# Altium PCB PCB2.PcbDoc
Units mil, origin at the board's own origin, x right, y up, seen from the top; angles counter-clockwise.
Board outline 4724.41 x 984.25 mil, 2 copper layers (Top Layer, Bottom Layer); 41 components, 34 nets, 152 pads, 25 vias.
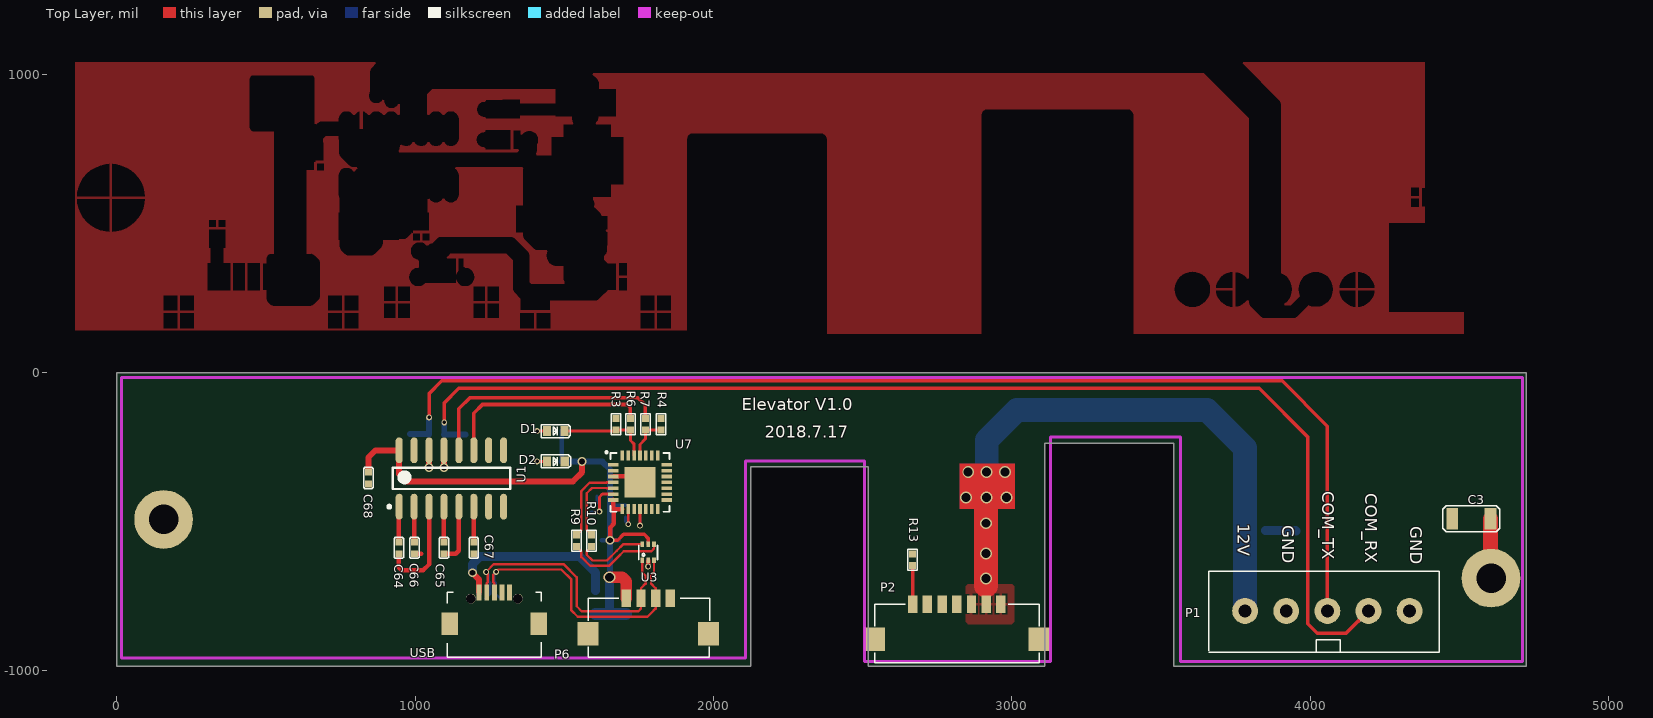
[diagram p0: Top Layer view]
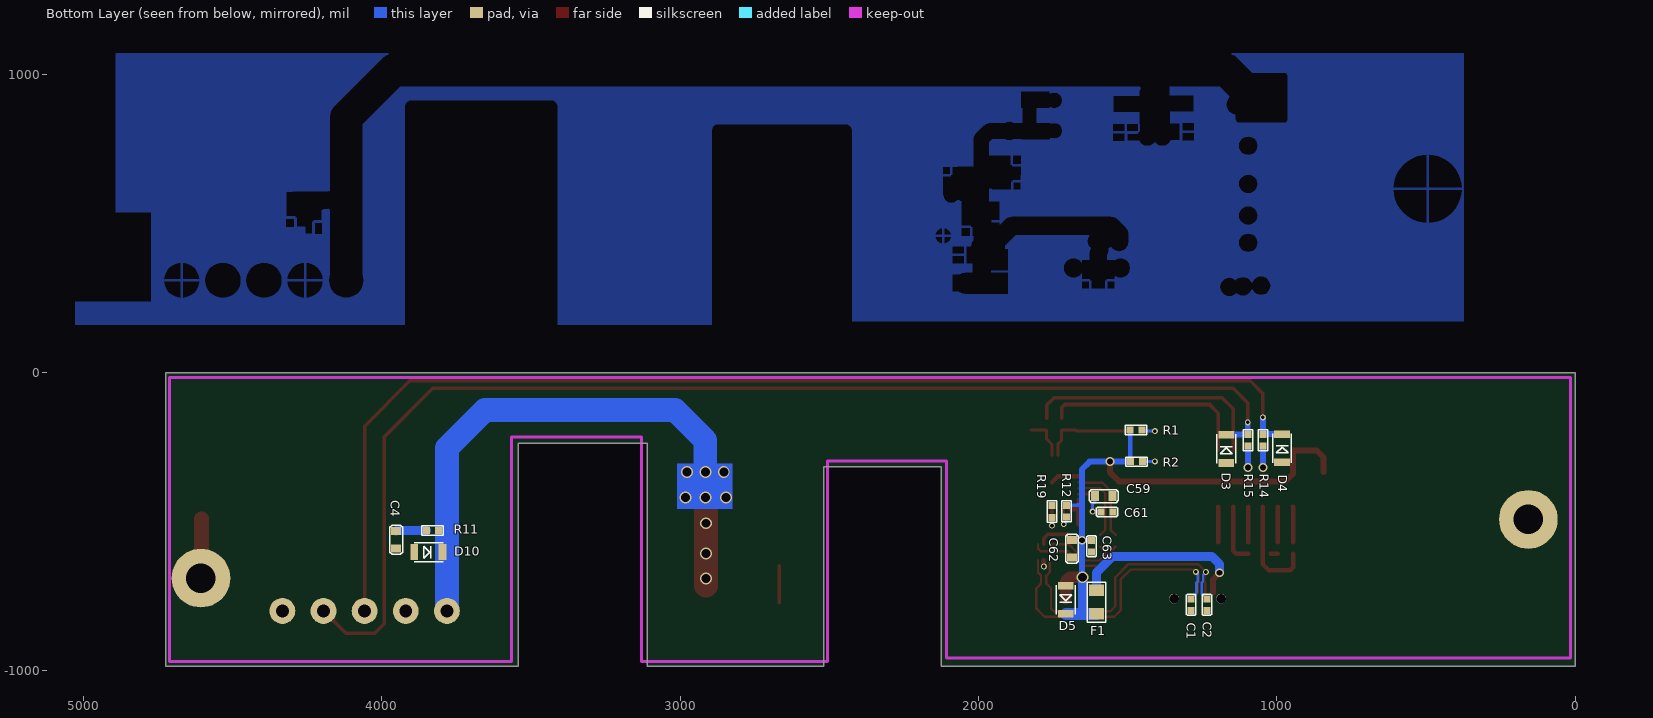
[diagram p1: Bottom Layer view, seen from below]

## Layer stack, top to bottom
Top Layer: signal copper 1.4
Dielectric: dielectric 12.6, FR-4, Dk 4.8
Bottom Layer: signal copper 1.4

## Board outline
0,-984.25 0,0 4724.41,0 4724.41,-984.25 3543.31,-984.25 3543.31,-236.22 3110.24,-236.22 3110.24,-984.25 2519.68,-984.25 2519.68,-314.96 2125.98,-314.96 2125.98,-984.25

## Design rules (kind name [scope] priority, off if disabled: settings)
Clearance [All] p1: gap=5
DiffPairsRouting [All] p1: maxlimit=10 minlimit=8 mostfreqgap=10 maxuncoupledlength=500
PolygonConnect [All] p1: connectstyle=Relief reliefconductorwidth=10 reliefentries=4 polygonreliefangle="90 Angle"
RoutingVias [All] p1: holewidth=28 width=50 viastyle="Through Hole" minholewidth=28 minwidth=50 maxholewidth=28 maxwidth=50
SilkscreenOverComponentPads [All] p1: minsilkscreentomaskgap=10
SolderMaskExpansion [All] p1: expansion=4
Width [All] p1: maxlimit=100 minlimit=8 preferedwidth=15
26 further rules are at their usual default settings.

## Classes and differential pairs
component class USB: C59 C61 C62 C63 D1 R1 R3 R4 R6 R7 R12 R19 U7
component class RS232: C64 C65 C66 C67 C68 D3 D4 R14 R15 U1
component class Interface: C1 C2 C3 C4 C58 D2 D5 D10 F1 P1 P2 P6 R2 R8 R9 R10 R11 R13 U3 USB
differential pair D: +D_P -D_N
differential pair DIN: +DIN_P -DIN_N
differential pair DD: +DD_P -DD_N

## Components (designator, comment, footprint, x,y, rotation, side; value= is the part's Value field where it differs from the comment)
C1 "3pF/50V" 0402C 1288,-759 r270 bottom
C2 "3pF/50V" 0402C 1235,-759 r270 bottom
C3 "1nF/1000V" 1206C 4604,-490 r180 top
C4 "10uF/25V" 0603C 3952,-590 r90 bottom
C59 "4.7uF/25V" 0603C 1550.95,-414 r0 bottom
C61 "0.1uF/50V" 0402C 1589.37,-467 r180 bottom
C62 "10uF/25V" 0603C 1687,-561 r270 bottom
C63 "0.1uF/50V" 0402C 1621,-562 r270 bottom
C64 "0.1uF/50V" 0402C 946,-568 r270 top
C65 "0.1uF/50V" 0402C 1097,-568 r270 top
C66 "0.1uF/50V" 0402C 998,-568 r270 top
C67 "0.1uF/50V" 0402C 1197,-568 r270 top
C68 "0.1uF/50V" 0402C 844,-373 r90 top
D1 "LED0" 0603LED 1442.22,-196.04 r0 top
D2 "LED0" 0603LED 1442.55,-297.78 r0 top
D3 "GBLC15C-LF-T7" SOD323 1170,-303 r90 bottom
D4 "GBLC15C-LF-T7" SOD323 983,-301 r90 bottom
D5 "PESD5V" SOD323 1708,-714 r270 bottom
D10 "PESD12V" SOD323 3891,-602 r180 bottom
F1 "1A" 0805R 1605,-730 r270 bottom
P1 "Header 5" KF350-5P 3782,-799 r0 top
P2 "Header 7" 7×1.25mmSMT 2668,-776 r0 top
P6 "Header 4" 4×1.25mmSMT 1708,-756.68 r0 top
R1 "1K" 0402R 1492.22,-193.04 r180 bottom
R2 "1K" 0402R 1490.53,-298.79 r180 bottom
R3 "0/NC" 0402R 1674,-193 r90 top
R4 "0/NC" 0402R 1825,-193 r90 top
R6 "0" 0402R 1722,-193 r90 top
R7 "0" 0402R 1772,-193 r90 top
R9 "33" 0402R 1541,-543.63 r270 top
R10 "33" 0402R 1592,-543.63 r270 top
R11 "33" 0402R 3850,-530 r180 bottom
R12 "1K/5%/1/8W" 0402R 1706,-445 r270 bottom
R13 "10K/NC" 0402R 2667.75,-608 r270 top
R14 "1K" 0402R 1047,-207.36 r270 bottom
R15 "1K" 0402R 1097,-207.36 r270 bottom
R19 "10K/5%/1/8W" 0402R 1754,-446 r270 bottom
U1 "MAX3232ESE+" SOIC127P600X265-16N 1122,-355 r90 top
U3 "NUF2042XV6T1" SOT563-6 1781,-603 r0 top
U7 "CP2102" QFN28N5X5-0p5P-L 1754,-368 r0 top
USB "Header 5" Micro_USB_PH 1266,-737 r90 top

## Footprints (in the part's own frame and the unit in brackets; to place one, negate y for a bottom-side part, rotate by r counter-clockwise, add the part's x,y. Pads: shape width x height; smd on the part's side, far side on the other; paste and mask are expansions set on the pad)
4×1.25mmSMT [mm]
  rect 1.8x2 smd: 0(-3.25,-3) 0(7,-3)
  rect 0.8x1.5 smd: 1(0,0) 2(1.25,0) 3(2.5,0) 4(3.75,0)
  round 0.5 on Top Overlay: ""(-0.875,0.432)
  silkscreen extent -3.25,-5 7.09,0
7×1.25mmSMT [mm]
  rect 1.8x2 smd: 0(-3.25,-3) 0(10.75,-3)
  rect 0.8x1.5 smd: 1(0,0) 2(1.25,0) 3(2.5,0) 4(3.75,0) 5(5,0) 6(6.25,0) 7(7.5,0)
  round 0.5 on Top Overlay: ""(-0.95,0.432)
  silkscreen extent -3.25,-5 10.75,0
0402C [mm]
  rect 0.6x0.6 smd: 1(0,0) 2(1,0)
  silkscreen extent -0.4,-0.4 1.4,0.4
0402R [mm]
  rect 0.6x0.6 smd: 1(0,0) 2(1,0)
  silkscreen extent -0.4,-0.4 1.4,0.4
0603C [mm]
  rect 0.7x0.85 smd: 1(0,0) 2(1.5,0)
  silkscreen extent -0.5,-0.55 2,0.55
0603LED [mm]
  rect 0.7x0.85 smd: 1(0,0) 2(1.5,0)
  silkscreen extent -0.5,-0.55 2,0.55
0805R [mm]
  rect 1x1.3 smd: 1(0,0) 2(2,0)
  silkscreen extent -0.7,-0.8 2.7,0.8
1206C [mm]
  rect 1x1.8 smd: 1(0,0) 2(3.25,0)
  silkscreen extent -0.8,-1.1 4.05,1.1
KF350-5P [mm]
  round 2.2 hole 1.1: 1(0,0) 2(3.5,0) 3(7,0) 4(10.5,0) 5(14,0)
  silkscreen extent -3.1,-3.5 16.51,3.4
Micro_USB_PH [mm]
  rect 1.35x0.42 smd: 1(0,1.3) 2(0,0.65) 3(0,0) 4(0,-0.65) 5(0,-1.3)
  rect 1.9x1.4 smd: 6(-2.675,3.811) 9(-2.675,-3.789)
  round 0.82 hole 0.82 unplated: 7(-0.525,2) 8(-0.525,-2)
  silkscreen extent -5.5,-4 0,4.01
QFN28N5X5-0p5P-L [mil]
  rect 34x12 smd mask+5: 1(-89.5,59.06) 2(-89.5,39.37) 3(-89.5,19.68) 4(-89.5,0) 5(-89.5,-19.68) 6(-89.5,-39.37) 7(-89.5,-59.06) 15(89.5,-59.06) 16(89.5,-39.37) 17(89.5,-19.68) 18(89.5,0) 19(89.5,19.68) 20(89.5,39.37) 21(89.5,59.06)
  rect 12x34 smd mask+5: 8(-59.06,-89.5) 9(-39.37,-89.5) 10(-19.68,-89.5) 11(0,-89.5) 12(19.68,-89.5) 13(39.37,-89.5) 14(59.06,-89.5) 22(59.06,89.5) 23(39.37,89.5) 24(19.68,89.5) 25(0,89.5) 26(-19.68,89.5) 27(-39.37,89.5) 28(-59.06,89.5)
  rect 102.36x102.36 smd mask+5: 29(0,0)
  silkscreen extent -114,-98 98,103
SOD323 [mm]
  rect 0.65x1.35 smd: A(0,0) K(2.4,0)
  silkscreen extent -0.03,-0.8 2.44,0.8
SOIC127P600X265-16N [mm] "SOIC, 16-Leads, Body 10.0x4.0mm (max), Pitch 1.27mm, IPC Medium Density"
  oval 2.2x0.6 smd: 1(-2.4,4.445) 2(-2.4,3.175) 3(-2.4,1.905) 4(-2.4,0.635) 5(-2.4,-0.635) 6(-2.4,-1.905) 7(-2.4,-3.175) 8(-2.4,-4.445) 9(2.4,-4.445) 10(2.4,-3.175) 11(2.4,-1.905) 12(2.4,-0.635) 13(2.4,0.635) 14(2.4,1.905) 15(2.4,3.175) 16(2.4,4.445)
  silkscreen extent -2.52,-5 0.9,5.42, body extent -2,-5 2,5, height 2.65
SOT563-6 [mil] "SOT563-6"
  rect 12x18 smd: 1(-19.68,-26.57) 2(0,-26.57) 3(20,-26.57) 4(20,27) 5(0,27) 6(-19.68,27)
  silkscreen extent -31,-24 32,24

## Part data
C1 C2 C64 C65 C66 C67 C68: library part C, "C"
C3 C4 C59 C61 C62 C63: library part Cap, "Capacitor"
D1 D2: "Typical INFRARED GaAs LED"
D3 D4: library part Diode, "Default Diode"
D5 D10: library part "D Zener", "Zener Diode"
F1: library part "Fuse 1", "Fuse"
P1 USB: "Header, 5-Pin"
P2: "Header, 7-Pin"
P6: "Header, 4-Pin"
R1 R2 R9 R10 R11 R13: library part Resistor, "Resistor SMD - IEC symbol version"
R3 R4 R6 R7 R12 R14 R15 R19: library part Res2, "Resistor"
U7: "Imported"

## Free pads (board coordinates)
  round 196.85 hole 98.43: 0(157.48,-492.13) 0(4606.3,-688.98)

## Via types
v1: diameter 20, hole 12, Top Layer to Bottom Layer, tented both sides, 10 vias
v2: diameter 40, hole 30, Top Layer to Bottom Layer, tented both sides, 10 vias
v3: diameter 30, hole 20, Top Layer to Bottom Layer, tented both sides, 5 vias

## Nets (pads, with @x,y where several pads share a name; then routed paths per layer and width w, separated by ;. In a path a pad name is that pad's centre, name@x,y a point inside that pad or via, vN(x,y) a via of type N, cw(c..) or ccw(c..) an arc to the next point about the centre after c; other vN are vias at no path point)
COM0_RX: D3.K P1.4 R15.1 | length 4033.8
  Top Layer w12: v1(1098,-167) 1098,-154 1098,-102 1147,-53 3829,-53 3992,-216 3992,-842 4024,-874 4120.39,-874 P1.4
  Bottom Layer w20: v1@1098,-168 1098,-206.36 R15.1 1168.85,-207.36 D3.K
COM0_TX: D4.K P1.3 R14.1 | length 3911.3
  Top Layer w12: v1(1047,-150) 1047,-71 1090,-28 3906,-28 4057.59,-179.59 P1.3
  Bottom Layer w20: D4.K 1046.15,-206.51 R14.1 v1(1047,-150)
CP_RXD: R4.1 R7.1 U7.25 | length 146
  Top Layer w10: U7.25 1754,-241 1772,-223 R7.1 R4.1
CP_TXD: D1.2 R3.1 R6.1 U7.26 | length 312.6
  Top Layer w10: D1.2 1670.96,-196.04 R3.1 R6.1 1722,-228 1734.32,-240.32 U7.26
D_N: R10.1 U7.5 | length 242.7
  Top Layer w8: R10.1 1575.5,-527.13 1575.5,-404.34 1593,-386.84 1642.16,-386.84 1643,-387.68 U7.5
D_P: R9.1 U7.4 | length 272.5
  Top Layer w8: R9.1 1557.5,-527.13 1557.5,-396.89 1567.19,-387.19 1585.54,-368.84 1642.16,-368.84 1643,-368 U7.4
DD_N: R10.2 U3.6 | length 250.9
  Top Layer w8: R10.2 1575.5,-599.5 1575.5,-611 1594.5,-630 1643,-630 1676,-597 1697,-576 U3.6
DD_P: R9.2 U3.4 | length 348.1
  Top Layer w8: R9.2 1557.5,-599.5 1557.5,-618.46 1587.04,-648 1650.46,-648 1680.23,-618.23 ; 1688.73,-609.73 1680.23,-618.23 ; U3.4 1801,-590 1792,-599 1699.46,-599 1680.23,-618.23
DIN_N: C2.1 P6.2 U3.1 USB.2 | length 1004.7
  Top Layer w8: USB.2 1240.41,-706 1244.2,-702.2 1244.2,-674.2 v1(1238.5,-668.5) 1238.5,-667.56 1264.06,-642 1497.46,-642 1542,-686.54 1542,-783.5 1558.27,-799.77 1655.23,-799.77 1748.44,-799.77 1757.21,-791 P6.2 1757.21,-723 1772.82,-707.39 1772.82,-681 1761.32,-669.5 U3.1
  Bottom Layer w8: C2.1 1252.5,-741.5 1252.5,-705 1248,-700.5 1248,-678 v1(1238.5,-668.5)
DIN_P: C1.1 P6.3 U3.3 USB.3 | length 1025.6
  Top Layer w8: USB.3 1266,-706 1262.2,-702.2 1262.2,-677.8 v1(1272,-668) 1280,-660 1490,-660 1524,-694 1524,-797 1545.5,-818.5 1648.5,-818.5 1778.93,-818.5 1790.71,-806.71 1806.43,-791 P6.3 1806.43,-723 1790.82,-707.39 1790.82,-680 1801,-669.82 U3.3
  Bottom Layer w8: v1(1272,-668) 1270,-668 1266,-672 1266,-700.5 1270.5,-705 1270.5,-741.5 C1.1
EARTH: C3.1 pad.0@4606.3,-688.98 | length 199.9
  Top Layer w50: C3.1 4604,-686.68 pad.0@4606.3,-688.98
GND: C1.2 C2.2 C3.2 C4.1 C59.1 C61.2 C62.2 C63.2 C66.2 C67.2 C68.1 D2.2 D3.A D4.A D5.A D10.A P1.2 P1.5 P2.0 P2.2 P2.3 P2.4 P6.0 P6.4 pad.0@157.48,-492.13 R13.1 R19.1 U1.15 U3.2 U7.3 U7.29 USB.5 USB.6 USB.9 | length 141.4
  Top Layer w15: C66.2 1021.37,-607.37 ; U7.3 1734.32,-348.32 U7.29 ; v1(1781,-650) U3.2
NetC4_2: C4.2 R11.1 | length 102.4
  Bottom Layer w30: R11.1 3951.06,-530 C4.2
NetC59_2: C59.2 C61.1 U7.6 | length 183.8
  Top Layer w10: v1(1618,-466) 1618,-417 1627.63,-407.37 U7.6
  Bottom Layer w10: C61.1 1617,-467 v1(1618,-466) 1618,-442 1610,-434 C59.2
NetC64_1: C64.1 U1.1 | length 118.9
  Top Layer w15: C64.1 946,-450.49 U1.1
NetC64_2: C64.2 U1.3 | length 352.6
  Top Layer w15: C64.2 946,-653 956,-663 1027,-663 1047,-643 U1.3
NetC65_1: C65.1 U1.4 | length 118.5
  Top Layer w15: C65.1 U1.4
NetC65_2: C65.2 U1.5 | length 201.8
  Top Layer w15: C65.2 1136.63,-607.37 1147,-597 U1.5
NetC66_1: C66.1 U1.2 | length 118.9
  Top Layer w15: U1.2 998,-450.49 C66.1
NetC67_1: C67.1 U1.6 | length 118.5
  Top Layer w15: C67.1 U1.6
NetD1_1: D1.1 R1.2 | length 78.2
  Top Layer w10: v1(1409.04,-196.04) D1.1
  Bottom Layer w10: v1(1409.04,-196.04) 1449.85,-196.04 R1.2
NetD2_1: D2.1 R2.2 | length 75.4
  Top Layer w10: v1(1409.37,-297.78) D2.1
  Bottom Layer w10: v1(1409.37,-297.78) 1450.16,-297.78 R2.2
NetF1_1: F1.1 USB.1 | length 609.4
  Top Layer w20: v3(1192,-671) 1214.82,-693.82 USB.1
  Bottom Layer w30: v3(1192,-671) 1192,-643 1219,-616 1550,-616 1605,-671 F1.1
NetP2_1: P2.1 R13.2 | length 123.3
  Top Layer w12: P2.1@2667.75,-770.68 R13.2
NetR12_2: R12.2 U7.9 | length 78.4
  Top Layer w10: v1(1714.63,-508.37) U7.9
  Bottom Layer w10: R12.2 1706,-499.74 v1(1714.63,-508.37)
NetR14_2: R14.2 U1.14 | length 128.8
  Top Layer w20: v3(1047,-318) U1.14
  Bottom Layer w20: v3(1047,-318) R14.2
NetR15_2: R15.2 U1.13 | length 128.8
  Top Layer w20: v3(1097,-318) U1.13
  Bottom Layer w20: v3(1097,-318) R15.2
NetR19_2: R19.2 U7.11 | length 83.1
  Top Layer w10: v1(1754,-513) U7.11
  Bottom Layer w10: v1(1754,-513) R19.2
RXD_USB: R4.2
TXD_USB: R3.2
UART2_RX: R7.2 U1.12 | length 834.8
  Top Layer w12: U1.12 1147,-215 1147,-182 1147,-121 1184,-84 1276,-84 1747,-84 1772,-109 R7.2
UART2_TX: R6.2 U1.11 | length 701.7
  Top Layer w12: U1.11 1197,-187 1197,-136 1226,-107 1288,-107 1711,-107 1722,-118 R6.2
VCC: C62.1 C63.1 C68.2 D5.K F1.2 P6.1 R1.1 R2.1 R12.1 U1.16 U3.5 U7.7 U7.8 | length 2338
  Top Layer w12: v3(1654,-562) 1679,-562 1699,-542 1768,-542 1781,-555 U3.5
  Top Layer w15: v3(1654,-562) 1654,-519 1666.5,-506.5 1666.5,-457.5 U7.8 ; 1664.5,-455.5 U7.7
  Top Layer w20: C68.2 844,-284 867.49,-260.51 U1.16 947,-340 972,-365 1529,-365 1560,-334 v3(1560,-298)
  Top Layer w40: v2(1652,-686) 1694,-686 1708,-700 P6.1
  Bottom Layer w12: 1655,-445 R12.1
  Bottom Layer w15: R2.1 1492.22,-297.1 R1.1 ; C63.1@1626,-562 v3(1654,-562) 1682,-562 C62.1@1683,-561 ; v2(1652,-686) v2@1654,-684
  Bottom Layer w20: R2.1 1580,-298.79 1627.79,-298.79 1654,-325 v3(1654,-562) v2@1654,-684 ; 1652,-807.74 1653,-808.74 ; D5.K@1707.75,-808.74 D5.K
  Bottom Layer w30: 1652,-807.74 v2(1652,-686)
  Bottom Layer w40: F1.2 1653,-808.74 D5.K@1707.75,-808.74
VCC_12V: D10.K P1.1 P2.5 P2.6 P2.7 R11.2 | length 1968.8
  Top Layer w80: 2914.06,-714.5 v2(2914.06,-505) v2@2914.06,-408
  Bottom Layer w80: 2916,-382 2916,-227 3018,-125 3654,-125 3782,-253 3782,-602 P1.1
  other v2: 2914.06,-690 2914.06,-606 2847,-419 2915,-419 2983,-419 2854,-334 2915.5,-334 2977,-334
pads on no net: P2. P6. U1.7 U1.8 U1.9 U1.10 U7.1 U7.2 U7.10 U7.12 U7.13 U7.14 U7.15 U7.16 U7.17 U7.18 U7.19 U7.20 U7.21 U7.22 U7.23 U7.24 U7.27 U7.28 USB.4 USB.7 USB.8

## Polygon pours and split planes (outlines as drawn)
VCC_12V on Top Layer "Mid-Layer 1-No Net" (solid, remove dead copper): 2845,-734 2845,-818 2845,-836 2850.77,-841 2853.08,-843 2946.63,-843 2999.76,-843 3005.54,-838 3009,-835 3009,-812 3009,-716 3002.07,-710 2937.39,-710 2853.08,-710 2846.15,-716 2845,-717 2845,-734
GND on Top Layer "Mid-Layer 1-No Net" (solid, remove dead copper, pour order 1001): -151.61,1054.65 -151.61,65.8 -130.61,87.85 4527.39,87.85 4527.39,194.92 4527.39,202.27 4263.39,202.27 4263.39,240.06 4263.39,501.44 4383.39,501.44 4383.39,1057.8 4380.39,1054.65 -59.61,1054.65
GND on Bottom Layer "Mid-Layer 1-No Net" (solid, remove dead copper, pour order 1002): 357.39,1089.85 357.39,101 378.39,123.04 5036.39,123.04 5036.39,230.12 5036.39,237.47 4772.39,237.47 4772.39,275.26 4772.39,536.64 4892.39,536.64 4892.39,1093 4889.39,1089.85 449.39,1089.85

## Keep-outs
Keep-Out Layer:
  lines w10: 17,-956 2107,-956 2107,-297 2507,-297 2507,-968 3129,-968 3129,-216 3565,-216 3565,-968 4711,-968 4711,-17 17,-17 17,-956

## Other copper
Top Layer:
  rectangle net VCC_12V: 2825,-458 3011,-305
Bottom Layer:
  rectangle net VCC_12V: 2825,-458 3011,-305

## Silkscreen, mask and mechanical layers (free items; w line width, h text height)
Top Overlay:
  text "Elevator V1.0" at 2095,-126 h40
  text "2018.7.17" at 2172,-218 h40
  text "COM_TX" at 4041,-398 h40 r270
  text "COM_RX" at 4184,-405 h40 r270
  text "12V" at 3757,-507 h40 r270
  text "GND" at 3907,-511 h40 r270
  text "GND" at 4335,-515 h40 r270
Mechanical 1:
  lines w10: 2125,-314.96 2487,-314.96 2487,-984.25 3149,-984.25 3149,-236.22 3543.31,-236.22 3543.31,-984.25 4724.41,-984.25 4724.41,0 0,0 0,-984.25 2125.98,-984.25 2125.98,-314.96